# Altium PCB DB15F.PcbDoc
Units mil, origin at the board's own origin, x right, y up, seen from the top; angles counter-clockwise.
Board outline 6000 x 4000 mil, 2 copper layers (Top Layer, Bottom Layer); 3 components, 14 nets, 31 pads, 0 vias.
Unrouted connection lines stored in the file: 15.
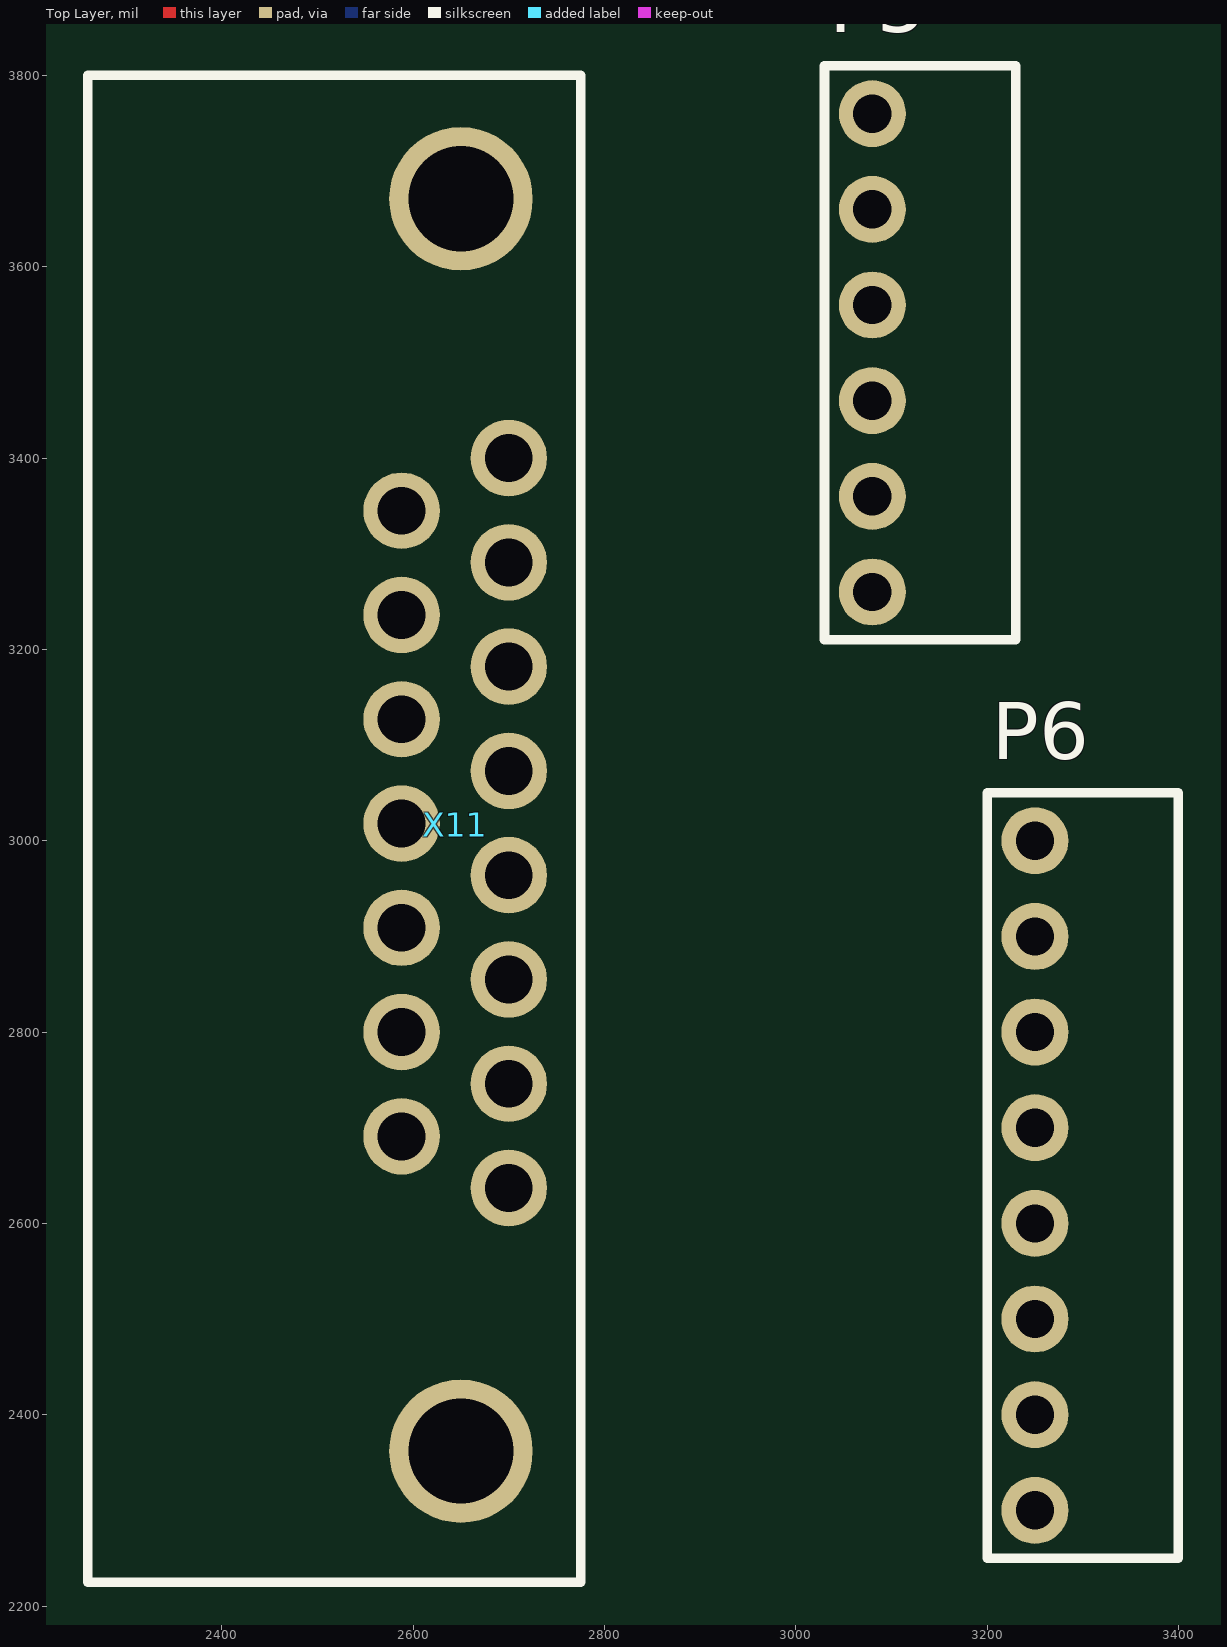
[diagram p0: Top Layer view]
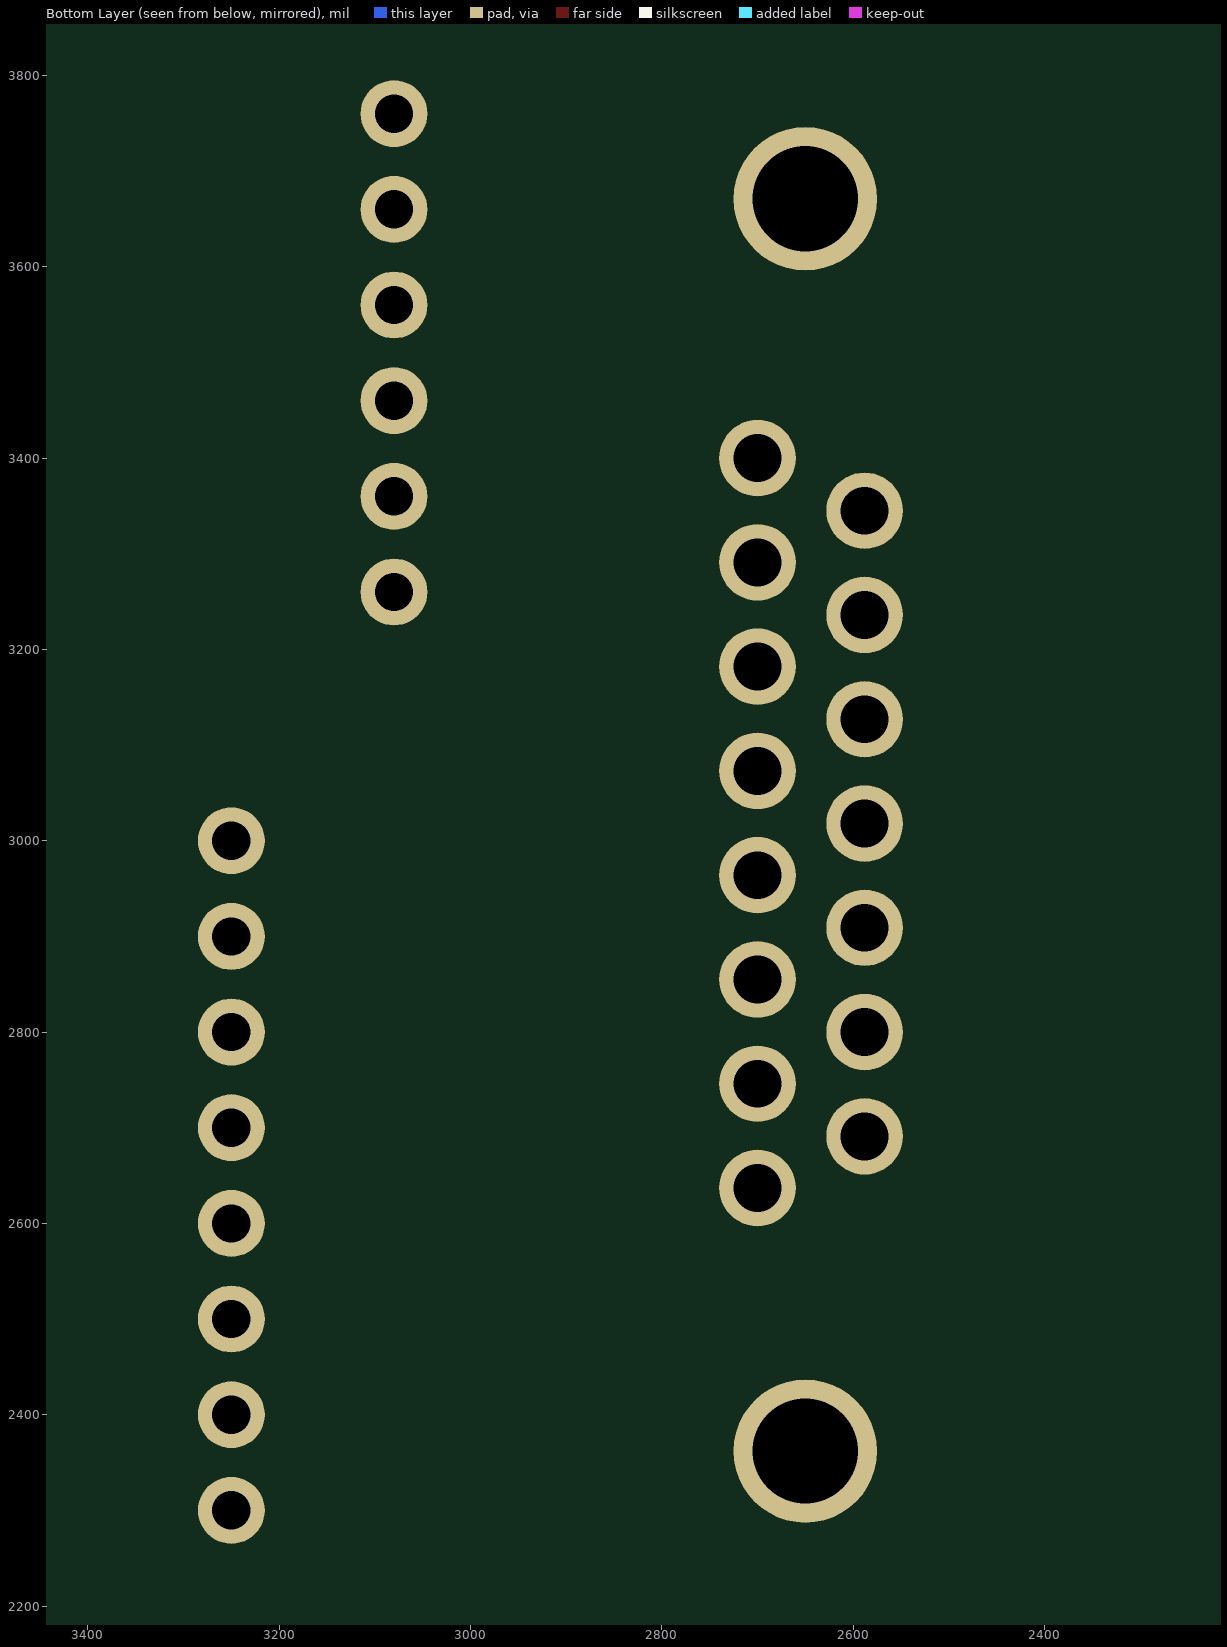
[diagram p1: Bottom Layer view, seen from below]

## Layer stack, top to bottom
Top Solder: solder mask 0.4, Solder Resist, Dk 3.5
Top Layer: signal copper 1.4
Dielectric 1: dielectric 12.6, FR-4, Dk 4.8
Bottom Layer: signal copper 1.4
Bottom Solder: solder mask 0.4, Solder Resist, Dk 3.5

## Board outline
1000,1000 7000,1000 7000,5000 1000,5000

## Design rules (kind name [scope] priority, off if disabled: settings)
Clearance [All] p1: gap=10
PolygonConnect [All] p1: connectstyle=Relief reliefconductorwidth=10 reliefentries=4 polygonreliefangle="90 Angle" airgapwidth=10
RoomDefinition DB15F [InComponentClass('DB15F')] p1: confinementstyle=ConfineIn formatcopy=TRUE lockcomponents=FALSE outline 1950,2165 3680,2165 3680,3860 1950,3860
RoutingVias [All] p1: holewidth=28 width=50 viastyle="Through Hole" minholewidth=28 minwidth=50 maxholewidth=28 maxwidth=50
SolderMaskExpansion [All] p1: expansion=4
Width [All] p1: maxlimit=10 minlimit=10 preferedwidth=10
29 further rules are at their usual default settings.

## Components (designator, comment, footprint, x,y, rotation, side; value= is the part's Value field where it differs from the comment)
P5 "SIL-CONN-6" SIL-CONN-6-R1 3080,3260 r180 top
P6 "SIL-CONN-8" SIL-CONN-8-R1 3250,2300 r180 top
X11 "DB-15" DB15F 2700,3400 r90 top

## Footprints (in the part's own frame and the unit in brackets; to place one, negate y for a bottom-side part, rotate by r counter-clockwise, add the part's x,y. Pads: shape width x height; smd on the part's side, far side on the other; paste and mask are expansions set on the pad)
DB15F [mil]
  round 80 hole 50: 1(-763,0) 2(-654,0) 3(-545,0) 4(-436,0) 5(-327,0) 6(-218,0) 7(-109,0) 8(0,0) 9(-709,112) 10(-600,112) 11(-491,112) 12(-382,112) 13(-273,112) 14(-164,112) 15(-55,112)
  round 150 hole 110: ""(-1038,50) ""(271,50)
  silkscreen extent -1175,-75 400,440, body extent -1163,-70 397,655, height 499
SIL-CONN-6-R1 [mil]
  round 70 hole 40: 1(0,0) 2(0,-100) 3(0,-200) 4(0,-300) 5(0,-400) 6(0,-500)
  silkscreen extent -150,-550 50,50, body extent -386,-550 13,50, height 99
SIL-CONN-8-R1 [mil]
  round 70 hole 40: 1(0,0) 2(0,-100) 3(0,-200) 4(0,-300) 5(0,-400) 6(0,-500) 7(0,-600) 8(0,-700)
  silkscreen extent -150,-750 50,50, body extent -386,-750 13,50, height 99

## Nets (pads, with @x,y where several pads share a name; then routed paths per layer and width w, separated by ;. In a path a pad name is that pad's centre, name@x,y a point inside that pad or via, vN(x,y) a via of type N, cw(c..) or ccw(c..) an arc to the next point about the centre after c; other vN are vias at no path point)
NetP5_1: P5.1 X11.9
NetP5_2: P5.2 X11.10
NetP5_3: P5.3 X11.11
NetP5_4: P5.4 X11.12 X11.13
NetP5_5: P5.5 X11.14
NetP5_6: P5.6 X11.15
NetP6_1: P6.1 X11.1
NetP6_2: P6.2 X11.2
NetP6_3: P6.3 X11.3
NetP6_4: P6.4 X11.4
NetP6_5: P6.5 X11.5
NetP6_6: P6.6 X11.6
NetP6_7: P6.7 X11.7
NetP6_8: P6.8 X11.8
pads on no net: X11.